# Altium PCB FT2232H_UART.PcbDoc
Units mil, origin at the board's own origin, x right, y up, seen from the top; angles counter-clockwise.
Board outline 1771.65 x 905.51 mil, 4 copper layers (Top Layer, Top Inner Layer, Bottom Inner Layer, Bottom Layer), stack 60.566 mil thick; 51 components, 44 nets, 202 pads, 83 vias.
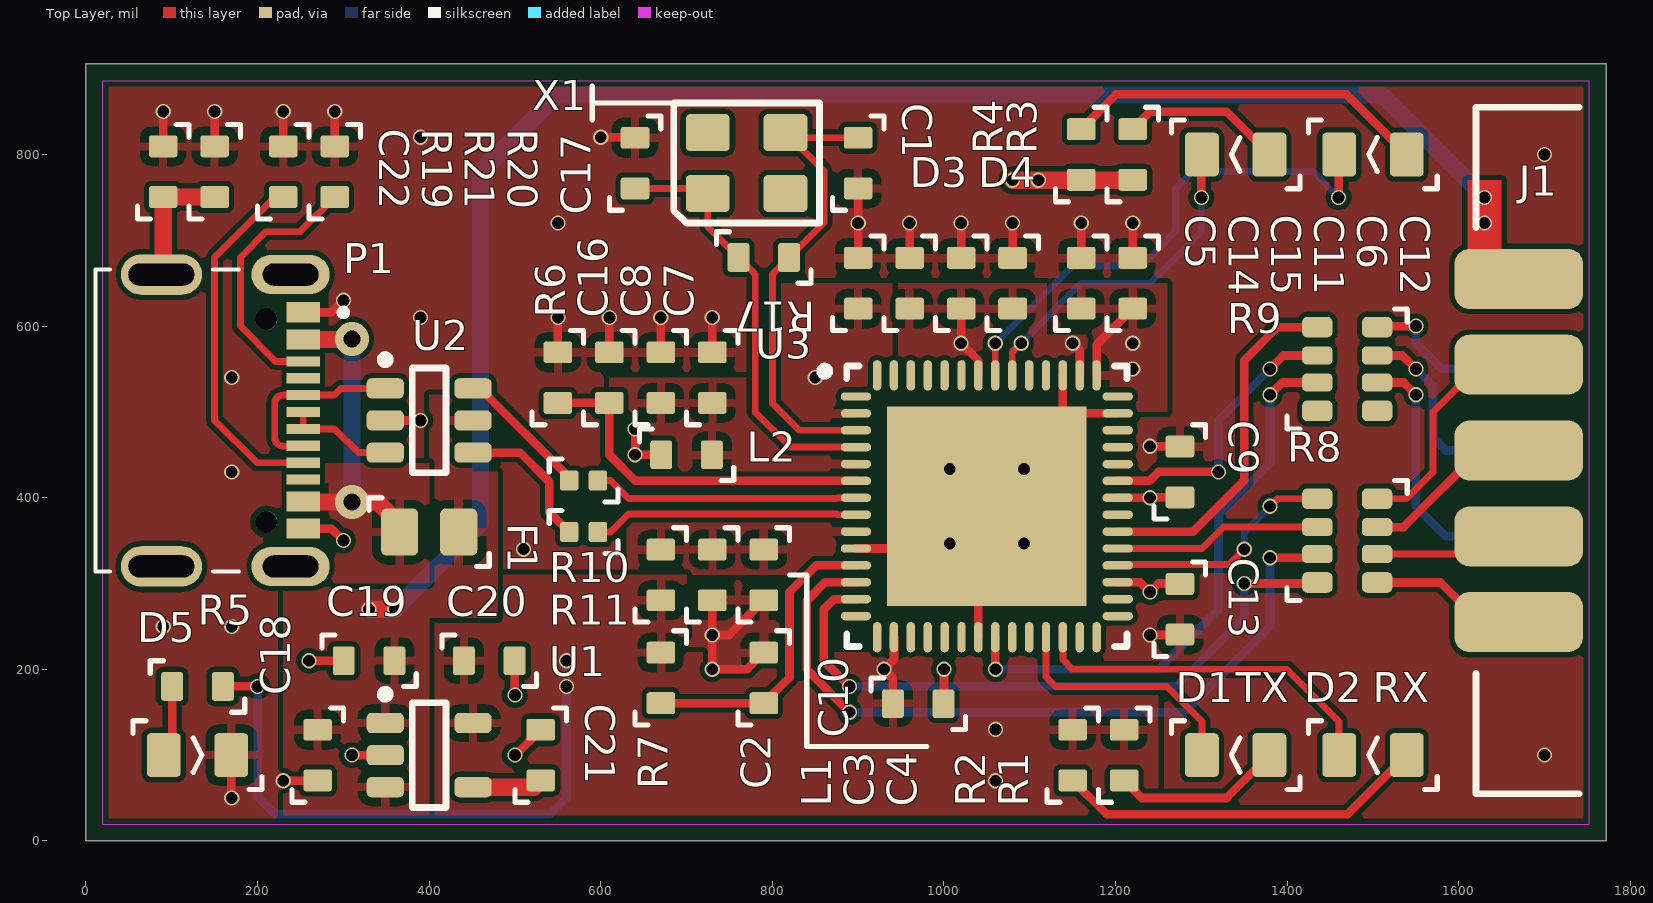
[diagram p0: Top Layer view]
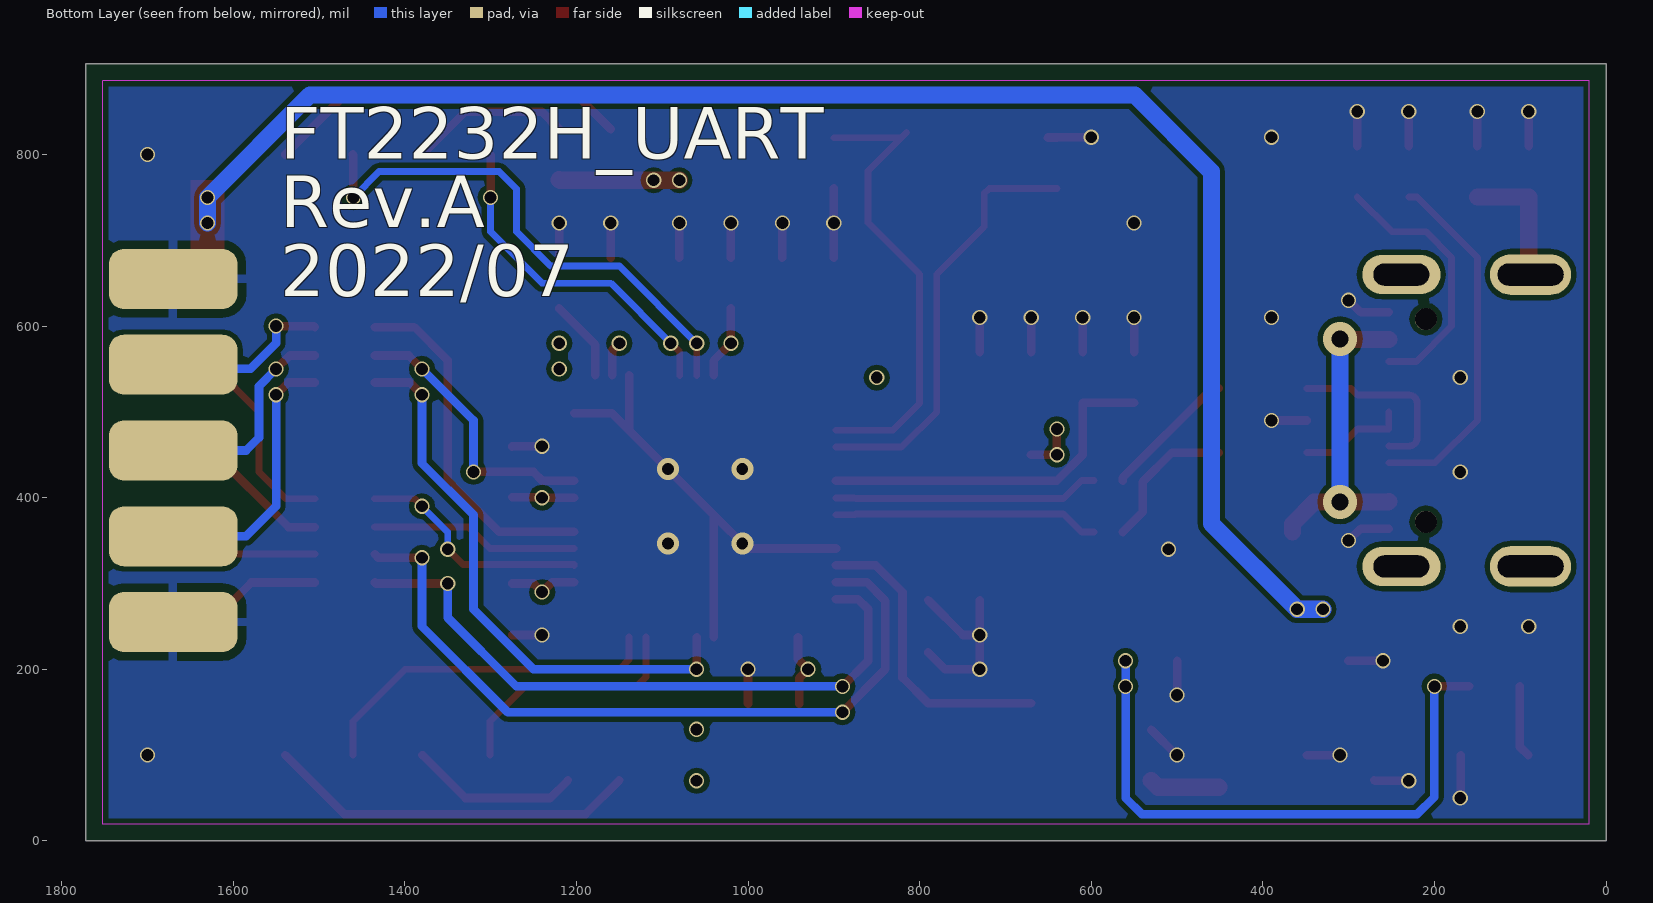
[diagram p1: Bottom Layer view, seen from below]
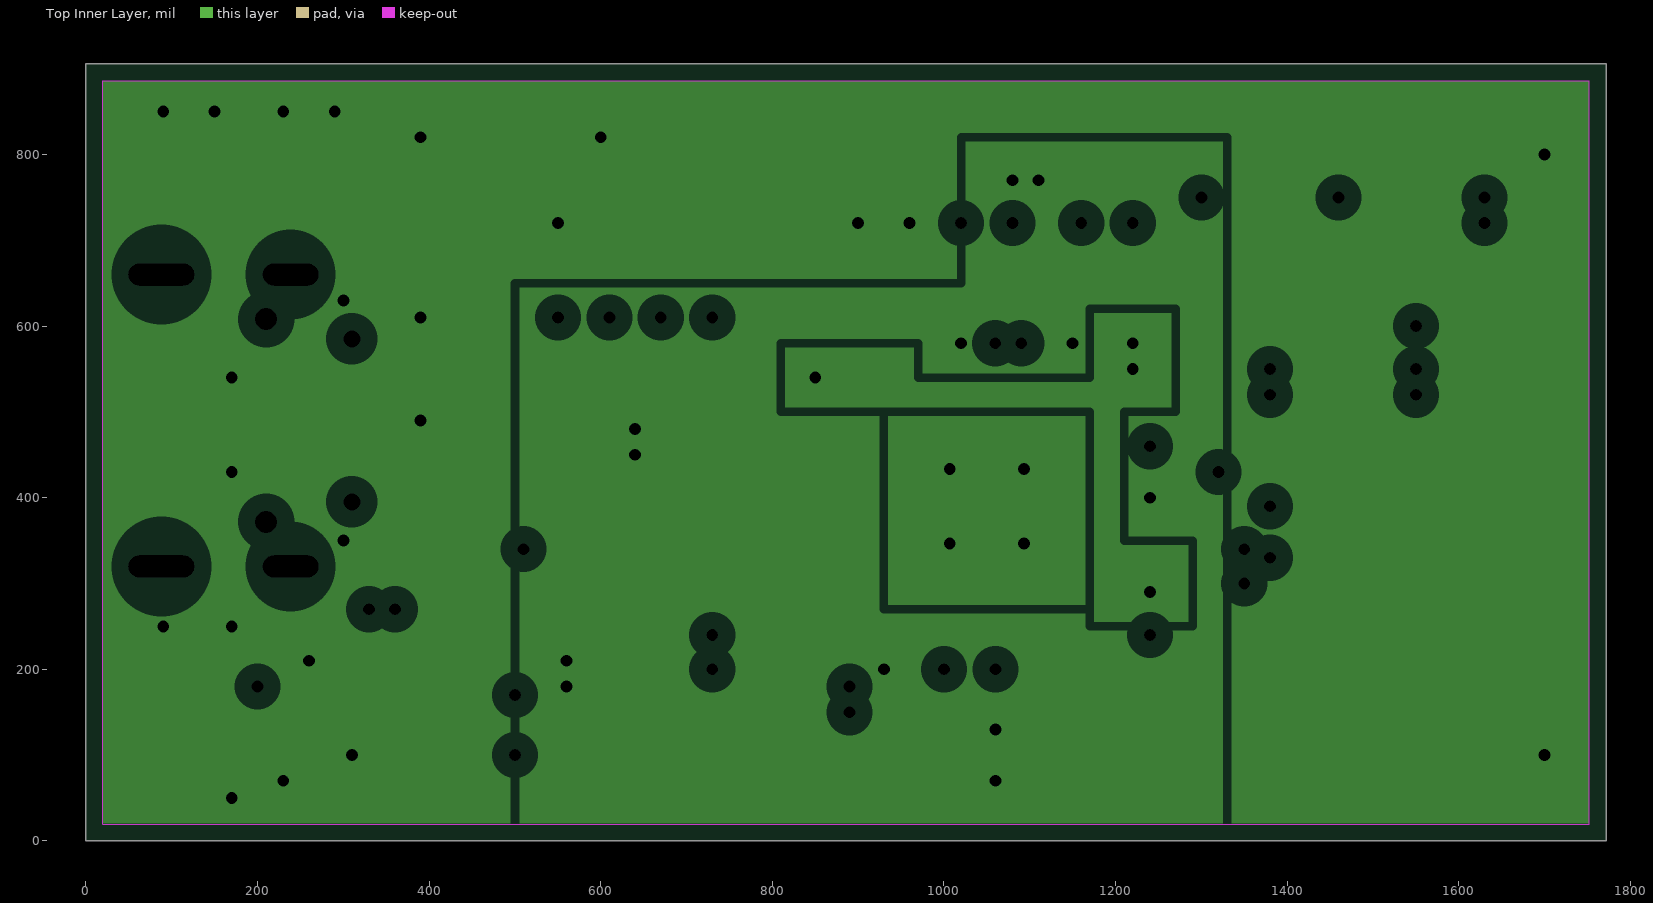
[diagram p2: Top Inner Layer, clearances drawn from the general rule]
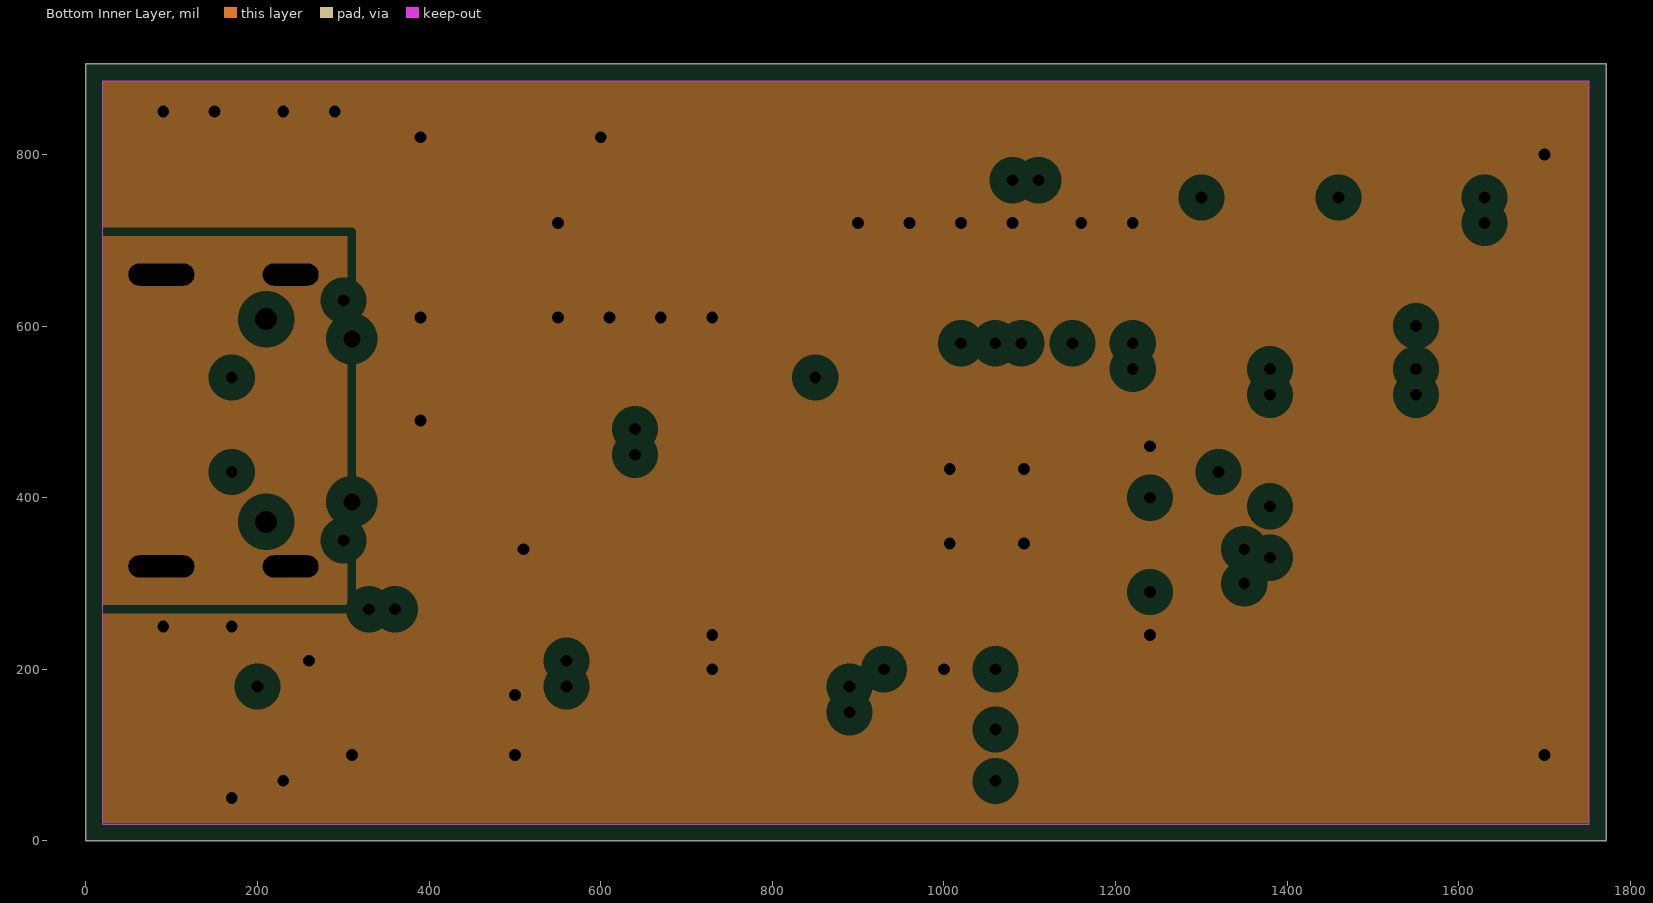
[diagram p3: Bottom Inner Layer, clearances drawn from the general rule]
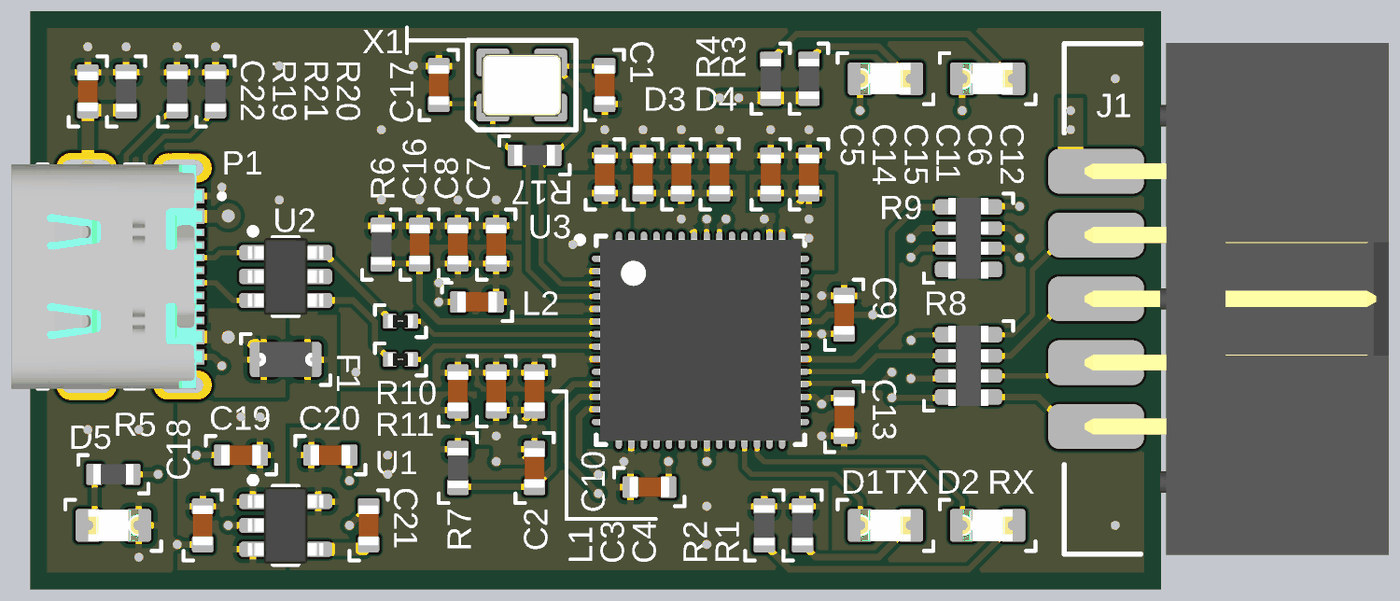
[diagram p4: 3D render of the assembled board from above, using the file's embedded part models]

## Layer stack, top to bottom
Top Solder: solder mask 0.4, Solder Resist, Dk 3.5
Top Layer: signal copper 1.37
Dielectric 1: core 20.472, FR-4, Dk 4.2
Top Inner Layer: plane copper 0.685, net (Multiple Nets)
Dielectric 3: prepreg 15.512, FR-4, Dk 4.2
Bottom Inner Layer: plane copper 0.685, net (Multiple Nets)
Dielectric 2: core 20.472, FR-4, Dk 4.2
Bottom Layer: signal copper 1.37
Bottom Solder: solder mask 0.4, Solder Resist, Dk 3.5

## Board outline
0,0 1771.65,0 1771.65,905.51 0,905.51

## Design rules (kind name [scope] priority, off if disabled: settings)
Clearance [All] p1: gap=6 ignorepadtopadclearanceinfootprint=FALSE
DiffPairsRouting [All] p1: maxlimit=10 minlimit=10 mostfreqgap=10 toplayer_minwidth=6 toplayer_maxwidth=10 toplayer_prefwidth=8 bottomlayer_minwidth=6 bottomlayer_maxwidth=10 bottomlayer_prefwidth=8 maxuncoupledlength=500
PlaneClearance [All] p1: clearance=20
PlaneConnect [All] p1: planeconnectstyle=Relief reliefexpansion=20 reliefentries=4 reliefconductorwidth=10 reliefairgap=10
PolygonConnect [All] p1: thpad.connectstyle=Relief thpad.reliefconductorwidth=10 thpad.reliefentries=4 thpad.polygonreliefangle="90 Angle" thpad.airgapwidth=10 smdpad.connectstyle=Relief smdpad.reliefconductorwidth=10 smdpad.reliefentries=4 smdpad.polygonreliefangle="90 Angle" smdpad.airgapwidth=10 via.connectstyle=Direct via.reliefconductorwidth=10 via.reliefentries=4 via.polygonreliefangle="90 Angle" via.airgapwidth=10
RoutingVias [All] p1: holewidth=23 width=25 viastyle="Through Hole" minholewidth=13 minwidth=17.72 maxholewidth=243 maxwidth=50
SolderMaskExpansion [All] p1: expansion=4
UnRoutedNet [All] p1: checkbadconnections=TRUE
Width [All] p1: maxlimit=20 minlimit=6 preferedwidth=10
26 further rules are at their usual default settings.

## Classes and differential pairs
differential pair USBD_R: +USBD_R_P -USBD_R_N
differential pair USBD_HS: +USBD_HS_P -USBD_HS_N
differential pair USBD_DS: +USBD_DS_P -USBD_DS_N

## Components (designator, comment, footprint, x,y, rotation, side; value= is the part's Value field where it differs from the comment)
C1 "27pF" 0603C_RF_M 900,790 r90 top
C2 "100nF" 0603C_RF_M 790,190 r90 top
C3 "4.7uF" 0603C_RF_M 730,310 r90 top
C4 "100nF" 0603C_RF_M 790,310 r90 top
C5 "100nF" 0603C_RF_M 900,650 r270 top
C6 "100nF" 0603C_RF_M 1160,650 r270 top
C7 "4.7uF" 0603C_RF_M 730,540 r270 top
C8 "100nF" 0603C_RF_M 670,540 r270 top
C9 "100nF" 0603C_RF_M 1275,430 r270 top
C10 "100nF" 0603C_RF_M 970,160 r180 top
C11 "100nF" 0603C_RF_M 1080,650 r270 top
C12 "4.7uF" 0603C_RF_M 1220,650 r270 top value=100nF
C13 "100nF" 0603C_RF_M 1275,270 r90 top
C14 "4.7uF" 0603C_RF_M 960,650 r270 top
C15 "100nF" 0603C_RF_M 1020,650 r270 top
C16 "100nF" 0603C_RF_M 610,540 r90 top
C17 "27pF" 0603C_RF_M 640,790 r270 top
C18 "10uF" 0603C_RF_M 270,100 r270 top
C19 "1uF" 0603C_RF_M 330,210 r180 top
C20 "100nF" 0603C_RF_M 470,210 r180 top
C21 "22nF" 0603C_RF_M 530,100 r270 top
C22 "10uF" 0603C_RF_M 90,780 r270 top
D1 "Unspecified" 0805LED_RF_M 1340,100 r0 top
D2 "Unspecified" 0805LED_RF_M 1500,100 r0 top
D3 "Unspecified" 0805LED_RF_M 1340,800 r0 top
D4 "Unspecified" 0805LED_RF_M 1500,800 r0 top
D5 "Unspecified" 0805LED_RF_M 130,100 r180 top
F1 "? A" PTC_0805_RF_M 400,360 r0 top
J1 "IDC-10P" IDC-10_100MIL_SIDE 1670,455 r0 top locked
L1 "1K" 0603C_RF_M 670,310 r90 top
L2 "1K" 0603C_RF_M 700,450 r0 top
P1 "USB-C" USBC-16P-TH 210,490 r270 top locked
R1 "? R" 0603R_RF_M 1210,100 r270 top
R2 "? R" 0603R_RF_M 1150,100 r270 top
R3 "? R" 0603R_RF_M 1220,800 r90 top
R4 "? R" 0603R_RF_M 1160,800 r90 top
R5 "? R" 0603R_RF_M 130,180 r180 top
R6 "12K" 0603R_RF_M 550,540 r270 top
R7 "10K" 0603R_RF_M 670,190 r270 top
R8 "330R" R0603_ARR_4R_CNVX_RF_H 1470,350 r270 top
R9 "330R" R0603_ARR_4R_CNVX_RF_H 1470,550 r270 top
R10 "22R" R0402_RF_M 580,420 r0 top
R11 "22R" R0402_RF_M 580,360 r0 top
R17 "1M" 0603R_RF_M 790,680 r180 top
R19 "10R" 0603R_RF_M 150,780 r90 top
R20 "5K1" 0603R_RF_M 290,780 r270 top
R21 "5K1" 0603R_RF_M 230,780 r90 top
U1 "RT9193" TI_SOT-23-5 400,100 r0 top
U2 "USBLC6-2SC6" TI_SOT-23-6 400,490 r0 top
U3 "FT2232H-56Q" FTDI_VQFN-56_RF_M 1050,390 r0 top
X1 "12 MHz" XTAL_3225 770,790 r0 top

## Footprints (in the part's own frame and the unit in brackets; to place one, negate y for a bottom-side part, rotate by r counter-clockwise, add the part's x,y. Pads: shape width x height; smd on the part's side, far side on the other; paste and mask are expansions set on the pad)
0603C_RF_M [mm] "Chip Capacitor 0603 Reflow Medium"
  rrect25% 0.65x0.85 smd: 1(-0.75,0) 2(0.75,0)
  silkscreen extent -1.4,-0.76 1.4,0.76, body extent -0.8,-0.4 0.8,0.41, height 0.9
0603R_RF_M [mm] "Chip Resistor 0603 Reflow Medium"
  rrect25% 0.65x0.85 smd: 1(-0.75,0) 2(0.75,0)
  silkscreen extent -1.4,-0.76 1.4,0.76, body extent -0.8,-0.4 0.8,0.4, height 0.55
0805LED_RF_M [mm] "Chip LED 0805 Reflow Medium"
  rrect25% 1x1.3 smd: A(1,0) C(-1,0)
  silkscreen extent -1.91,-1.02 1.91,1.02, body extent -1,-0.62 1,0.63, height 0.7
FTDI_VQFN-56_RF_M [mm] "FTDI FT2232H-56Q Reflow Medium Density"
  oval 0.9x0.25 smd: 1(-3.875,3.25) 2(-3.875,2.75) 3(-3.875,2.25) 4(-3.875,1.75) 5(-3.875,1.25) 6(-3.875,0.75) 7(-3.875,0.25) 8(-3.875,-0.25) 9(-3.875,-0.75) 10(-3.875,-1.25) 11(-3.875,-1.75) 12(-3.875,-2.25) 13(-3.875,-2.75) 14(-3.875,-3.25) 29(3.875,-3.25) 30(3.875,-2.75) 31(3.875,-2.25) 32(3.875,-1.75) 33(3.875,-1.25) 34(3.875,-0.75) 35(3.875,-0.25) 36(3.875,0.25) 37(3.875,0.75) 38(3.875,1.25) 39(3.875,1.75) 40(3.875,2.25) 41(3.875,2.75) 42(3.875,3.25)
  oval 0.25x0.9 smd: 15(-3.25,-3.875) 16(-2.75,-3.875) 17(-2.25,-3.875) 18(-1.75,-3.875) 19(-1.25,-3.875) 20(-0.75,-3.875) 21(-0.25,-3.875) 22(0.25,-3.875) 23(0.75,-3.875) 24(1.25,-3.875) 25(1.75,-3.875) 26(2.25,-3.875) 27(2.75,-3.875) 28(3.25,-3.875) 43(3.25,3.875) 44(2.75,3.875) 45(2.25,3.875) 46(1.75,3.875) 47(1.25,3.875) 48(0.75,3.875) 49(0.25,3.875) 50(-0.25,3.875) 51(-0.75,3.875) 52(-1.25,3.875) 53(-1.75,3.875) 54(-2.25,3.875) 55(-2.75,3.875) 56(-3.25,3.875)
  rect 5.9x5.9 smd: 57(0,0)
  silkscreen extent -4.92,-4.15 4.15,4.15, body extent -4.02,-4.02 4.02,4.02, height 0.9
IDC-10_100MIL_SIDE [mil]
  rrect50% 150x70 smd: 1(0,200) 3(0,100) 5(0,0) 7(0,-100) 9(0,-200)
  rrect50% 150x70 smd far side: 2(0,200) 4(0,100) 6(0,0) 8(0,-100) 10(0,-200)
  silkscreen extent -50,-400 70,400, body extent -18,-401 458,401, height 144
PTC_0805_RF_M [mm] "Resettable Fuse SMD 0805 Reflow Medium Density"
  rrect30% 1.1x1.4 smd: 1(-0.875,0) 2(0.875,0)
  silkscreen extent -1.78,-1.02 1.78,1.02, body extent -1.05,-0.7 1.05,0.7, height 0.94
R0402_RF_M [mm] "Resistor SMD 0402 Reflow Medium Density"
  rrect30% 0.55x0.6 smd: 1(-0.425,0) 2(0.425,0)
  silkscreen extent -1.02,-0.64 1.02,0.64, body extent -0.5,-0.25 0.5,0.25, height 0.35
R0603_ARR_4R_CNVX_RF_H [mm] "Resistor Array SMD 0603x4 Single 1206 ACAS Convex Lead Reflow High Density"
  rrect50% 0.61x0.9 smd: 1(-1.24,-0.885) 4(1.24,-0.885) 5(1.24,0.885) 8(-1.24,0.885)
  rrect50% 0.53x0.9 smd: 2(-0.4,-0.885) 3(0.4,-0.885) 6(0.4,0.885) 7(-0.4,0.885)
  silkscreen extent -1.78,-1.78 1.78,1.78, body extent -1.6,-0.8 1.6,0.8, height 0.71
TI_SOT-23-5 [mm]
  rrect50% 1.1x0.6 smd: 1(-1.3,0.95) 2(-1.3,0) 3(-1.3,-0.95) 4(1.3,-0.95) 5(1.3,0.95)
  silkscreen extent -1.42,-1.55 0.5,1.92, body extent -1.5,-1.53 1.5,1.53, height 1.45
TI_SOT-23-6 [mm]
  rrect50% 1.1x0.6 smd: 1(-1.3,0.95) 2(-1.3,0) 3(-1.3,-0.95) 4(1.3,-0.95) 5(1.3,0) 6(1.3,0.95)
  silkscreen extent -1.42,-1.55 0.5,1.92, body extent -1.5,-1.52 1.5,1.53, height 1.45
USBC-16P-TH [mm] "https://aliexpress.ru/item/1005001283294686.html"
  rect 0.6x1 smd: 1(-3.2,1.1) 2(-2.4,1.1) 11(2.4,1.1) 12(3.2,1.1)
  rect 0.3x1 smd: 3(-1.75,1.1) 4(-1.25,1.1) 5(-0.75,1.1) 6(-0.25,1.1) 7(0.25,1.1) 8(0.75,1.1) 9(1.25,1.1) 10(1.75,1.1)
  oval 1.158x2.316 hole 0.65 slot 1.65 at 90 deg: S1(-4.32,0.725) S2(4.32,0.725)
  oval 1.2x2.4 hole 0.65 slot 1.95 at 90 deg: S3(-4.32,-3.1) S4(4.32,-3.1)
  round 0.65 hole 0.65 unplated: ""(-3,0) ""(3,0)
  silkscreen extent -4.47,-5.05 4.47,2.39, body extent -4.47,-6.08 4.47,1.52, height 3.23
XTAL_3225 [mm] "ECX-32: 4-SMD No Lead (3.20mm x 2.50mm)"
  rrect25% 1.3x1.1 smd: 1(-1.15,-0.9) 2(1.15,-0.9) 3(1.15,0.9) 4(-1.15,0.9)
  silkscreen extent -2.16,-1.78 2.16,1.78, body extent -1.6,-1.25 1.6,1.25, height 0.8

## Part data
C1 C2 C3 C4 C5 C6 C7 C8 C9 C10 C11 C12 C13 C14 C15 C16 C17 C18 C19 C20 C21 C22: library part C, "Capacitor", Manufacturer="Generic Brand", Max Voltage="? V", Tolerance=?, Category=Capacitor, Mounting Technology=SMT, Supplier Link=http://
D1 D2 D3 D4 D5: library part LED, "LED", Forward Voltage Drop="? V", Manufacturer="Generic Brand", Category=Diode, Emitting Color=Unspecified, Mounting Technology=SMT, Supplier Link=http://
F1: library part PPTC, "Resettable Fuse", Manufacturer="Generic Brand", Max Voltage="? V", Category=Fuse, Hold Current="? A", Mounting Technology=SMT, Supplier Link=http://
J1: "IDC Connector Header Double Row 10 Position", Manufacturer="Wurth Elektronik", Manufacturer Part No=61201021621, Supplier Part No=732-2094-ND, Mounting Technology=THT, Supplier=DigiKey, Supplier Link=https://www.digikey.com/en/products/detail/wurth-elektronik/61201021621/2060590
L1 L2: library part FB, "Ferrite Bead", Category=Inductance/Fixed, Mounting Technology=SMT
P1: library part USBC-16P-TH, "USB Type C Socket 16-Pin"
R1 R2 R3 R4 R5 R6 R7 R10 R11 R17 R19 R20 R21: library part R, "Resistor", Manufacturer="Generic Brand", Max Voltage="? V", Power Rating="? W", Tolerance=?, Category=Resistor, Mounting Technology=SMT, Supplier Link=http://
R8 R9: library part RA-4, "Resistor Array 4x Isolated"
U1: "IC REG LINEAR 300MA SOT23-5", Output Voltage="? V"
U2: "Low Capacitance USB ESD Protection", Case=SOT-23-6, Manufacturer=STMicroelectronics, Supplier Part No=9000039051, Mounting Type=SMT, Product Name=USBLC6-2SC6, Supplier=Chipdip, Supplier Link=https://www.chipdip.by/product/usblc6-2sc6
U3: "IC DUAL USB TO UART/FIFO 56VQFN", Manufacturer="Future Technology Devices International Ltd", Package=VQFN-56, Supplier Part No=768-1276-ND, Category=IC, Datasheet=https://www.ftdichip.com/Support/Documents/DataSheets/ICs/DS_FT2232H.pdf, Mounting Technology=SMT, Product Number=FT2232H-56Q-TRAY, Supplier=DigiKey, Supplier Link=https://www.digikey.com/en/products/detail/ftdi-future-technology-devices-international-ltd/FT2232H-56Q-TRAY/5994773
X1: library part XT-4P, "Crystal Resonator (4 Leads)", Manufacturer="Generic Brand", Tolerance="? ppm", Category=Crystal, Mounting Technology=SMT, Supplier Link=http://

## Via types
v1: diameter 17.72, hole 13.78, Top Layer to Bottom Layer, tented both sides, 77 vias
v2: diameter 25.59, hole 13.78, Top Layer to Bottom Layer, 4 vias
v3: diameter 40, hole 20, Top Layer to Bottom Layer, tented both sides, 2 vias

## Nets (pads, with @x,y where several pads share a name; then routed paths per layer and width w, separated by ;. In a path a pad name is that pad's centre, name@x,y a point inside that pad or via, vN(x,y) a via of type N, cw(c..) or ccw(c..) an arc to the next point about the centre after c; other vN are vias at no path point)
3V3: C9.2 C10.2 C11.2 C14.2 C15.2 C20.2 L1.1 L2.1 R1.1 R2.1 R3.1 R4.1 R5.1 R7.1 U1.5 U3.16 U3.36 U3.44 U3.50 | length 1192.5
  Top Layer w10: R5.1 v1(200,180) ; v1(640,480) v1(640,450) L2.1 ; C10.2 940.47,189.53 v1(930,200) 941.73,211.73 U3.16 ; C15.2 v1(1020,580) 1040.16,559.84 U3.50 ; v1(1150,580) 1158.27,571.73 U3.44 ; U3.36 1239.84,399.84 v1(1240,400) 1240.47,400.47 C9.2
  Top Layer w20: v1(1080,770) v1(1110,770) 1219.53,770 R3.1
  Bottom Layer w10: v1(200,180) 200,51.18 220,31.18 541.18,31.18 560,50 v1(560,180) v1(560,210)
  other v1: 1060,70 1060,130
5V: C18.1 C19.1 F1.2 J1.1 U1.1 U1.3 U2.5 | length 1897.8
  Top Layer w20: v1(330,270) v1(360,270)
  Bottom Layer w20: v1(330,270) v1(360,270) 460,370 460,780 549.33,869.33 1510.67,869.33 v1(1630,750) v1(1630,720)
CC1: P1.3 R20.2 | length 309.5
  Top Layer w8: P1.3 221.1,558.9 180,600 180,680 210,710 249.53,710 R20.2
CC2: P1.9 R21.1 | length 422.9
  Top Layer w8: R21.1 220.47,750.47 150,680 150,490 199.21,440.79 P1.9
DTR1: R9.2 U3.37 | length 328.3
  Top Layer w10: U3.37 1202.89,419.86 1239.86,419.86 1250,430 v1(1320,430) ; v1(1380,550) 1395.75,565.75 R9.2
  Bottom Layer w10: v1(1320,430) 1320,490 v1(1380,550)
DTR_CON: J1.6 R9.7 | length 246.2
  Top Layer w10: R9.7 1534.25,565.75 v1(1550,550)
  Bottom Layer w10: v1(1550,550) 1570,530 1570,470 1585,455 J1.6
FT_RXD0: R8.4 U3.13 | length 763.5
  Top Layer w10: v1(890,180) 860,210 860,270 871.73,281.73 U3.13 ; v1(1350,300) 1433.98,300 R8.4
  Bottom Layer w10: v1(890,180) 1270,180 1350,260 v1(1350,300)
FT_RXD0_CON: J1.9 R8.5 | length 184.3
  Top Layer w10: R8.5 1578.82,301.18 1625,255 J1.9
FT_RXD1: R8.2 U3.33 | length 242.9
  Top Layer w8: U3.33 1300.79,340.79 1325.75,365.75 R8.2
FT_RXD1_CON: J1.5 R8.7 | length 202.1
  Top Layer w10: R8.7 1535.75,365.75 1625,455 J1.5
FT_TXD0: R8.3 U3.12 | length 885.4
  Top Layer w10: v1(890,150) 840,200 840,280 861.42,301.42 U3.12 ; v1(1380,330) 1430.91,330 R8.3
  Bottom Layer w10: v1(890,150) 1280,150 1380,250 v1(1380,330)
FT_TXD0_CON: J1.7 R8.6 | length 173.8
  Top Layer w8: R8.6 1649.25,334.25 J1.7
FT_TXD1: R8.1 U3.32 | length 277.2
  Top Layer w8: U3.32 1202.56,322.32 1332.32,322.32 v1(1350,340) ; v1(1380,390) 1388.82,398.82 R8.1
  Bottom Layer w8: v1(1350,340) 1350,360 v1(1380,390)
FT_TXD1_CON: J1.3 R8.8 | length 270.9
  Top Layer w8: R8.8 1538.82,398.82 1570,430 1570,500 1625,555 J1.3
GND: C1.1 C2.2 C3.1 C4.1 C5.1 C6.1 C7.1 C8.1 C9.1 C10.1 C11.1 C12.1 C13.1 C14.1 C15.1 C16.2 C17.1 C18.2 C19.2 C20.1 C21.1 C22.1 D5.C J1.2 J1.10 P1.1 P1.12 R6.1 R19.2 R20.1 R21.2 U1.2 U2.2 U3.10 U3.21 U3.41 U3.45 U3.57 | length 1979.5
  Top Layer w10: C22.1 v1(90,850) ; R19.2 v1(150,850) ; D5.C 169.37,50.63 v1(170,50) ; v1(230,70) 269.53,70 C18.2 ; R21.2 v1(230,850) ; P1.12 285.98,364.02 v1(300,350) ; P1.1 285.98,615.98 v1(300,630) ; v1(260,210) C19.2 ; R20.1 v1(290,850) ; v1(310,100) U1.2 ; U2.2 v1(390,490) ; C20.1 499.53,170.47 v1(500,170) ; v1(500,100) 500.47,100 C21.1 ; R6.1 v1(550,610) ; v1(600,820) 650,820 650.47,819.53 C17.1 ; C16.2 v1(610,610) ; C8.1 v1(670,610) ; C3.1 v1(730,240) ; C7.1 v1(730,610) ; C2.2 770.47,200 v1(730,200) v1(730,240) ; C4.1 749.53,240 v1(730,240) ; U3.10 1000.79,340.79 U3.57@1040.16,380.16 ; C5.1 v1(900,720) C1.1 ; C14.1 v1(960,720) ; C10.1 1000,160.47 v1(1000,200) ; C15.1 v1(1020,720) ; U3.21 U3.57@1040.16,380.16 ; C11.1 v1(1080,720) ; U3.45 U3.57@1138.58,478.58 ; C6.1 v1(1160,720) ; U3.41 1158.27,498.27 U3.57@1138.58,478.58 ; C12.1 v1(1220,720) ; v1(1240,240) 1274.53,240 C13.1 ; v1(1240,460) 1274.53,460 C9.1 ; U3.57@1040.16,380.16 U3.57 U3.57@1138.58,478.58
  other v1: 1700,100 90,250 170,250 510,340 170,430 170,540 390,610 550,720 1700,800 390,820
  other v2: 1006.69,346.69 1093.31,346.69 1006.69,433.31 1093.31,433.31
NetC21_2: C21.2 U1.4 | length 82.1
  Top Layer w20: U1.4 522.13,62.6 C21.2
NetC22_2: C22.2 P1.S1 P1.S2 P1.S3 P1.S4 R19.1 | length 151.2
  Top Layer w20: P1.S3 90,662.13 C22.2 R19.1
NetD1_A: D1.A R1.2 | length 198.6
  Top Layer w10: R1.2 1230.47,50 1329.37,50 D1.A
NetD2_A: D2.A R2.2 | length 434.1
  Top Layer w10: R2.2 1189.29,31.18 1470.56,31.18 D2.A
NetD3_A: D3.A R3.2 | length 188.6
  Top Layer w10: R3.2 1240.47,850 1329.37,850 D3.A
NetD4_A: D4.A R4.2 | length 425.1
  Top Layer w10: R4.2 1200.47,870 1469.37,870 D4.A
NetD5_A: D5.A R5.2 | length 84.1
  Top Layer w10: D5.A 100.47,109.84 R5.2
NRST: C2.1 R7.2 U3.11 | length 352.3
  Top Layer w10: R7.2 C2.1 820,190.47 820,290 851.1,321.1 U3.11
OSCI: C1.2 R17.1 U3.3 X1.3 | length 548.1
  Top Layer w8: X1.3 X1.3@821.18,819.53 ; U3.3 831.42,478.58 800,510 800,660.47 R17.1 860,720.47 860,780.71 X1.3@821.18,819.53 ; C1.2 X1.3@821.18,819.53
OSCO: C17.2 R17.2 U3.4 X1.1 | length 499.1
  Top Layer w8: C17.2 718.82,760.47 X1.1 724.72,715.75 R17.2 780,660.47 780,500 821.1,458.9 U3.4
REF: C16.1 R6.2 U3.6 | length 420.5
  Top Layer w10: R6.2 C16.1 610,450 640.47,419.53 U3.6
RTS1: R9.1 U3.34 | length 413.3
  Top Layer w10: U3.34 1290.47,360.47 1350,420 1350,560 1388.82,598.82 R9.1
RTS_CON: J1.4 R9.8 | length 226.2
  Top Layer w10: R9.8 1506.02,600 v1(1550,600)
  Bottom Layer w10: v1(1550,600) 1550,580 1579.5,550.5 1668.5,550.5 1670,550 J1.4@1650,570
RXLED0: D1.C U3.25 | length 288.9
  Top Layer w8: U3.25 1118.9,191.1 1130,180 1260,180 1300.63,139.37 D1.C
RXLED1: D3.C U3.48 | length 395.9
  Top Layer w8: U3.48 1079.53,569.53 v1(1090,580)
  Top Layer w10: v1(1300,750) 1300,799.37 D3.C
  Bottom Layer w8: v1(1090,580) 1160,650 1240,650 1300,710 v1(1300,750)
TXDEN0: R9.3 U3.22 | length 662.4
  Top Layer w10: U3.22 1059.84,200.16 v1(1060,200) ; v1(1380,520) 1394.25,534.25 R9.3
  Bottom Layer w10: v1(1060,200) 1250,200 1320,270 1320,380 1380,440 v1(1380,520)
TXDEN_CON: J1.8 R9.6 | length 315.6
  Top Layer w10: R9.6 1535.75,534.25 v1(1550,520)
  Bottom Layer w10: v1(1550,520) 1550,390 1585,355 J1.8
TXLED0: D2.C U3.26 | length 417.3
  Top Layer w8: U3.26 1138.58,211.42 1150,200 1400,200 1460.63,139.37 D2.C
TXLED1: D4.C U3.49 | length 612.4
  Top Layer w8: U3.49 v1(1059.84,580)
  Top Layer w10: v1(1460,750) 1460,799.37 D4.C
  Bottom Layer w8: v1(1059.84,580) 1149.84,670 1230,670 1270,710 1270,760 1290,780 1430,780 v1(1460,750)
USBD_DS_N: R10.2 U3.7 | length 309.8
  Top Layer w8: R10.2 611.56,420 632.56,399 874.88,399 875.72,399.84 U3.7
USBD_DS_P: R11.2 U3.8 | length 309.8
  Top Layer w8: R11.2 611.56,360 632.56,381 874.88,381 875.72,380.16 U3.8
USBD_HS_N: P1.5 P1.8 U2.1 | length 217.5
  Top Layer w8: P1.8 253.31,460 230,460 cw(c230,470) 220,470 220,510 cw(c229.53,510) 229.53,519.53 P1.5 ; P1.5@253.31,520 P1.5 ; U2.1 297.4,527.4 289.53,519.53 P1.5
USBD_HS_P: P1.6 P1.7 U2.3 | length 126.6
  Top Layer w8: P1.6 P1.7 289.84,480.16 317.4,452.6 U2.3
USBD_R_N: R10.1 U2.6 | length 158.6
  Top Layer w10: U2.6 459.34,527.4 563.27,423.47 R10.1
USBD_R_P: R11.1 U2.4 | length 171.1
  Top Layer w10: U2.4 505.86,452.6 540,418.46 540,383.27 R11.1
VBUS: F1.1 P1.2 P1.11 | length 381
  Top Layer w20: P1.11 253.82,395 v3(310,395) 340,395 365.55,369.45 F1.1 ; P1.2 305.51,584.49 v3@310,580
  Bottom Layer w20: v3(310,395) v3(310,585)
VCORE: C5.2 C6.2 C12.2 C13.2 U3.2 U3.31 U3.43 | length 176.8
  Top Layer w10: U3.43 1177.95,578.43 C12.2 ; U3.31 1228.58,301.42 v1(1240,290) 1250,300 1274.53,300 C13.2
  other v1: 850,540 1220,550 1220,580
VPHY: C7.2 C8.2 L2.2 U3.5
VPLL: C3.2 C4.2 L1.2 U3.9
pads on no net: P1. P1.4 P1.10 R9.4 R9.5 U3.1 U3.14 U3.15 U3.17 U3.18 U3.19 U3.20 U3.23 U3.24 U3.27 U3.28 U3.29 U3.30 U3.35 U3.38 U3.39 U3.40 U3.42 U3.46 U3.47 U3.51 U3.52 U3.53 U3.54 U3.55 U3.56 X1.2 X1.4

## Polygon pours and split planes (outlines as drawn)
GND on Top Layer "NONET_L-01_P-001" (solid, remove dead copper, pour order 22): 0,0 1770,0 1770,900 0,900
GND on Top Layer "GND_L01_P020" (solid, remove dead copper, pour order 20): 830,160 830,300 829.98,299.98 700,299.98 700,160
VCORE on Top Layer "VCORE_L01_P018" (solid, remove dead copper, pour order 18): 1120,650 1260,650 1260,500 1120,500
3V3 on Top Layer "3V3_L01_P016" (solid, remove dead copper, pour order 16): 940,650 1120,650 1120,590 1170,590 1170,510 940,510
VCORE on Top Layer "VCORE_L01_P014" (solid, remove dead copper, pour order 14): 940,650 940,480 810,480 810,650
VPHY on Top Layer "VPHY_L01_P012" (solid, remove dead copper, pour order 12): 610,540 610,410 930,410 930,540
VPLL on Top Layer "VPLL_L01_P008" (solid, remove dead copper, pour order 8): 630,310 630,390 930,390 930,310
3V3 on Top Layer "3V3_L01_P006" (solid, remove dead copper, pour order 6): 1248.82,30 1250,31.18 1250,220 700,220 700,310 480,310 480,260 400,260 400,30
5V on Top Layer "5V_L01_P004" (solid, remove dead copper, pour order 4): 230,30 230,300 400,300 400,520 450,520 450,430 480,430 480,260 400,260 400,30
VBUS on Top Layer "VBUS_L01_P002" (solid, remove dead copper, pour order 2): 220,440 400,440 400,300 220,300
GND on Bottom Layer "GND_L04_P000" (solid, remove dead copper, pour order 0): 0,905.51 1771.65,905.51 1771.65,0 0,0
GND on Top Inner Layer (split plane): 1164.9,275.1 935.1,275.1 935.1,494.9 1164.9,494.9
VCORE on Top Inner Layer (split plane): 1264.9,505.1 1210,505.1 1208.05,504.71 1206.4,503.6 1205.29,501.95 1204.9,500 1204.9,350 1205.29,348.05 1206.4,346.4 1208.05,345.29 1210,344.9 1284.9,344.9 1284.9,255.1 1175.1,255.1 1175.1,270 1175.1,500 1174.71,501.95 1173.6,503.6 1171.95,504.71 1170,505.1 815.1,505.1 815.1,574.9 964.9,574.9 964.9,540 965.29,538.05 966.4,536.4 968.05,535.29 970,534.9 1170,534.9 1171.95,535.29 1173.6,536.4 1174.71,538.05 1175.1,540 1175.1,614.9 1264.9,614.9
GND on Top Inner Layer (split plane): 1751.56,885.41 1751.56,20.1 1335.1,20.1 1335.1,820 1334.71,821.95 1333.6,823.6 1331.95,824.71 1330,825.1 1020,825.1 1018.05,824.71 1016.4,823.6 1015.29,821.95 1014.9,820 1014.9,655.1 500,655.1 498.05,654.71 496.4,653.6 495.29,651.95 494.9,650 494.9,30 494.9,20.1 20.1,20.1 20.1,885.42
3V3 on Top Inner Layer (split plane): 1324.9,20.1 505.1,20.1 505.1,30 505.1,644.9 1020,644.9 1021.95,645.29 1023.6,646.4 1024.71,648.05 1025.1,650 1025.1,814.9 1324.9,814.9
NetC22_2 on Bottom Inner Layer (split plane): 304.9,275.1 20.1,275.1 20.1,704.9 304.9,704.9
GND on Bottom Inner Layer (split plane): 1751.56,885.41 1751.56,20.1 20.1,20.1 20.1,264.9 310,264.9 311.95,265.29 313.6,266.4 314.71,268.05 315.1,270 315.1,710 314.71,711.95 313.6,713.6 311.95,714.71 310,715.1 20.1,715.1 20.1,885.42

## Keep-outs
Keep-Out Layer:
  lines w1: 19.68,19.68 19.68,885.83 1751.97,885.83 1751.97,19.68 19.68,19.68

## Other copper
Top Layer:
  rectangle net 5V: 1610,655 1650,770
Top Inner Layer (plane layer: these items are gaps in the copper):
  lines w10: 500,0 500,30 500,650 1020,650 1020,820 1330,820 1330,0 ; 930,500 930,270 1170,270 ; 1170,270 1170,500 810,500 810,580 970,580 970,540 1020,540 1150,540 1170,540 1170,620 1270,620 1270,500 1210,500 1210,350 1290,350 1290,250 1170,250 1170,270
Bottom Inner Layer (plane layer: these items are gaps in the copper):
  lines w10: 0,270 310,270 310,710 0,710

## Silkscreen, mask and mechanical layers (free items; w line width, h text height)
Top Overlay:
  lines w6: 590,840 590,880 ; 590,860 685,860 ; 820,310 840,310 840,110 980,110
  text "TX" at 1340,150 h60
  text "RX" at 1500,150 h60
Bottom Overlay:
  text "FT2232H_UART" at 1545,795 h60
  text "Rev.A" at 1545,715 h60
  text "2022/07" at 1545,635 h60
Mechanical 1:
  the board outline again, w3
Mechanical 15:
  lines w5: 866.14,492.13 905.51,492.13 ; 885.83,472.44 885.83,511.81

## Text inside footprints (layer, text, board x,y; h text height)
P1: Mechanical 13 "PCB EDGE" at 20,270 h24 r270